# EAGLE board stupid (EAGLE 6.5.0)
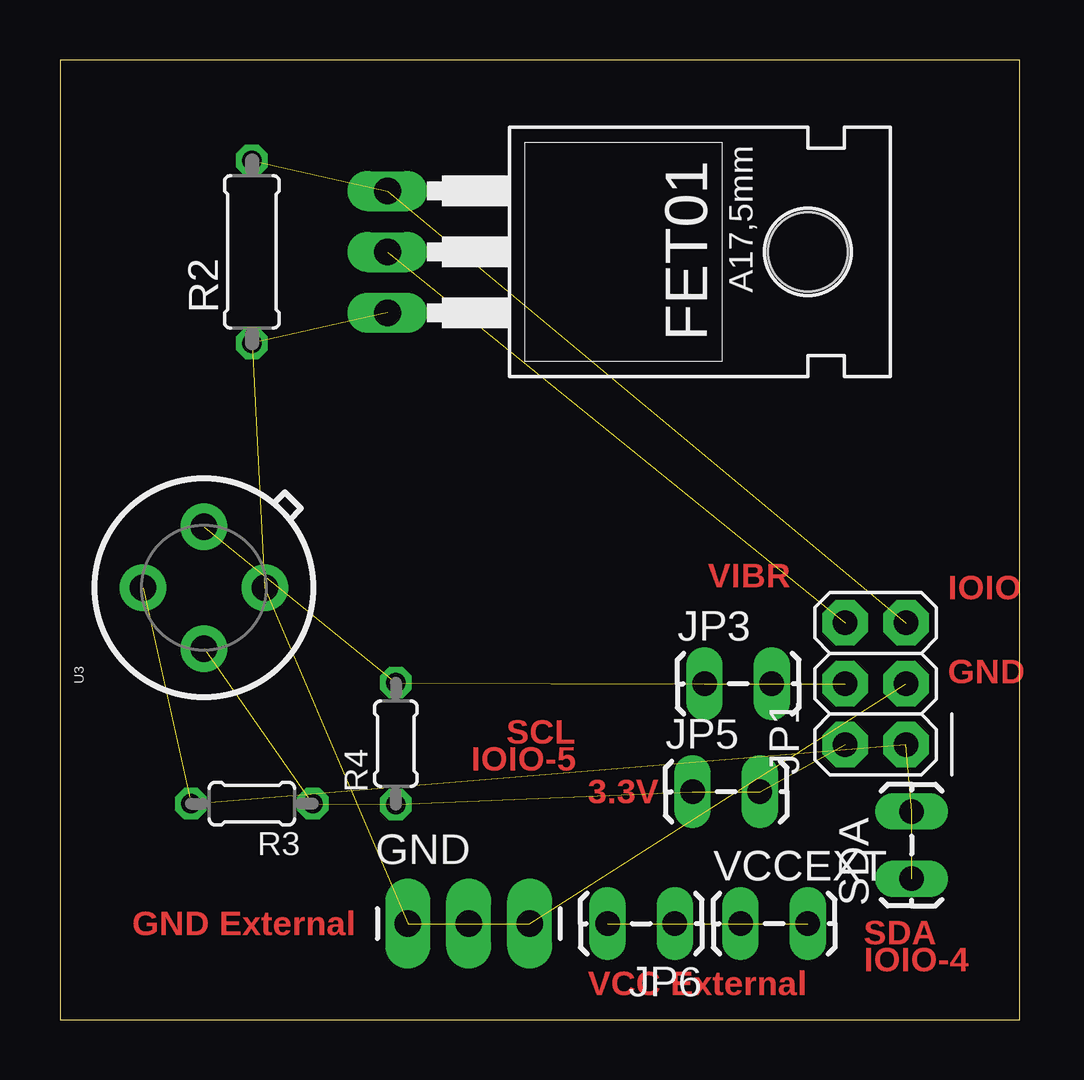
[diagram p0: board, top side]
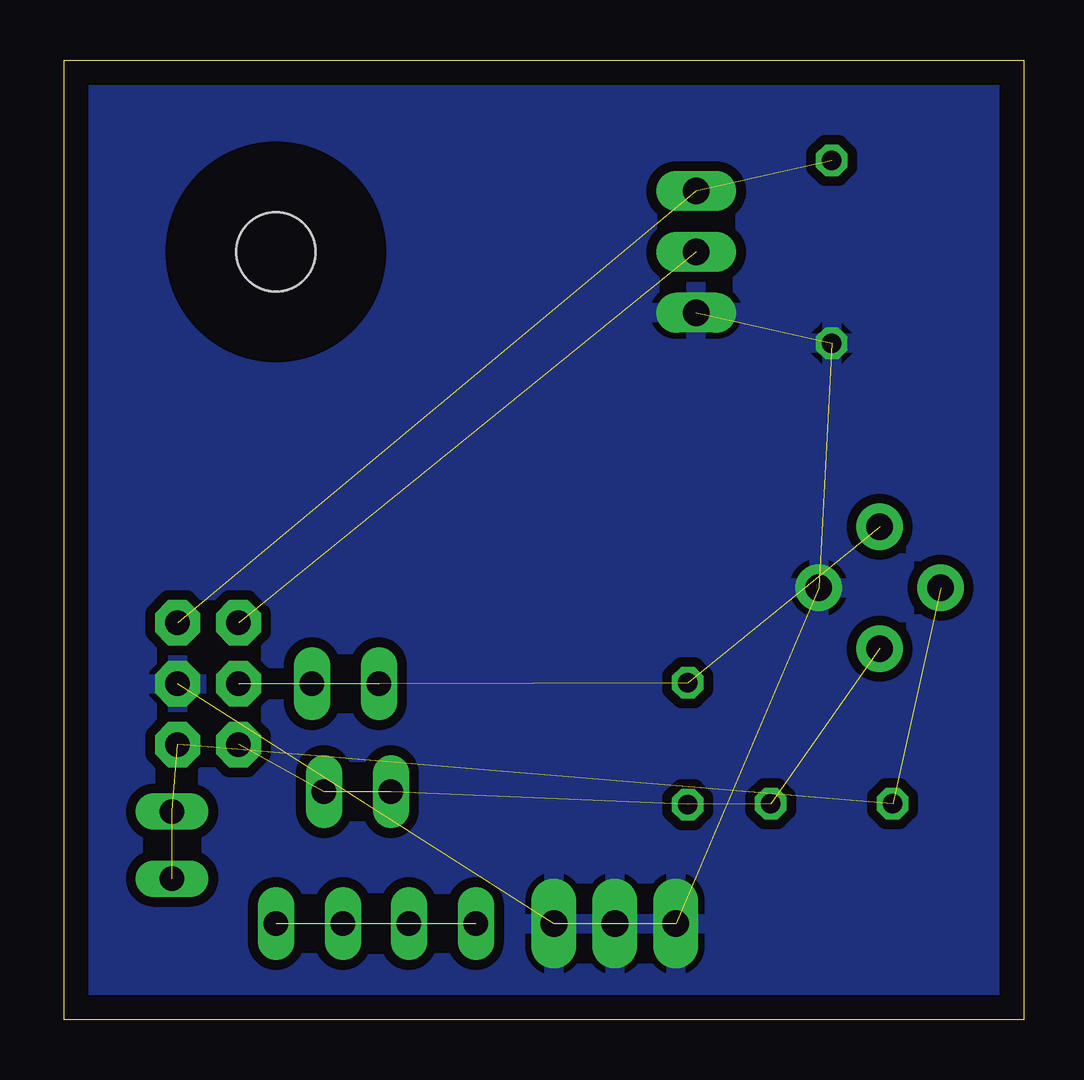
[diagram p1: board, bottom side, seen from below]

Size 40 x 40 mm. Coordinates in mm from the lower left corner, seen from the top.
Outline: 0,0 40,0 40,40 0,40 0,0
Copper layers (1*16): Top 0.035mm / dielectric 1.5mm / Bottom 0.035mm
Design rules "default": minimum track width 10mil, minimum drill 24mil, track to track 8mil, track to pad 8mil, pad to pad 8mil, via to via 8mil, smd to smd 8mil, copper to edge 40mil, drill to drill 8mil, minimum pad ring 10mil, minimum via ring 8mil, stop-mask expansion 4mil, vias tented up to drill 0mil, thermal gap 10mil

## Footprints (pad centres in the part's own frame; a part is rotated, then mirrored left to right if it is on the bottom)
TO220AH = drill 1.118 long: B -2.54,-6.35; C 0,-6.35; E 2.54,-6.35 | hole 3.302: 0,11.176
1X03_LONGPADS = drill 1.118 pad 1.88 long: 1 0,0; 2 2.54,0; 3 5.08,0
2X03 = drill 1.016 pad 1.88 octagon: 1 -2.54,-1.27; 2 -2.54,1.27; 3 0,-1.27; 4 0,1.27; 5 2.54,-1.27; 6 2.54,1.27
1X02_LOCK_LONGPADS = drill 1.016 long: 1 -0.127,0; 2 2.667,0
0207/7 = drill 0.813 octagon: 1 -3.81,0; 2 3.81,0
0204/5 = drill 0.813 octagon: 1 -2.54,0; 2 2.54,0
TO-39 = drill 1.1 pad 1.93: 1 2.54,0; 2 0,2.54; 3 -2.54,0; 4 0,-2.54

## Placement (x,y rotation side)
FET01  IRF3710  [TO220AH]  20,32 270 top
GND  [1X03_LONGPADS]  14.5,4 0 top
JP1  [2X03]  34,14 90 top
JP3  [1X02_LOCK_LONGPADS]  27,14 0 top
JP5  [1X02_LOCK_LONGPADS]  26.5,9.5 0 top
JP6  [1X02_LOCK_LONGPADS]  25.5,4 180 top
R2  10k  [0207/7]  8,32 90 top
R3  4.1k  [0204/5]  8,9 180 top
R4  4.1k  [0204/5]  14,11.5 90 top
SDA  [1X02_LOCK_LONGPADS]  35.5,6 90 top
U3  MLX90614_  [TO-39]  6,18 90 top
VCCEXT  [1X02_LOCK_LONGPADS]  28.5,4 0 top

## Library data of the parts
FET01 = transistor-power
GND JP1 JP3 JP5 JP6 SDA VCCEXT = SparkFun-Connectors
R2-R4 = rcl
U3 = SparkFun-Sensors

## Nets
GND: FET01.E GND.1 GND.2 GND.3 JP1.3 R2.1 U3.4
N$1: JP6.1 JP6.2 VCCEXT.1 VCCEXT.2
N$2: FET01.C JP1.6
N$15: JP1.4 JP3.1 JP3.2 R4.2 U3.1
N$16: JP1.1 R3.2 SDA.1 SDA.2 U3.2
N$18: FET01.B JP1.5 R2.2
VCC3: JP1.2 JP5.1 JP5.2 R3.1 R4.1 U3.3

## Tracks (layer width: path | path; a pad name or v marks a point on that pad's centre or on a via)
GND  (6 unrouted)
  pour Bottom (isolate 0.406): 0,40 40,40 40,0 0,0
N$1  (3 unrouted)
N$2  (1 unrouted)
N$15  (4 unrouted)
N$16  (4 unrouted)
N$18  (2 unrouted)
VCC3  (5 unrouted)

## Text on the board
Top: VIBR | IOIO | GND | SCL / IOIO-5 | 3.3V | GND External | SDA / IOIO-4 | VCC External